# EAGLE board circuit (EAGLE 9.7.0)

Size 262.35 x 241.12 mm. Coordinates in mm from the lower left corner, seen from the top.
Outline: 0,0 262.35,0 262.35,241.12 0,241.12 0,0
Copper layers (1*16): Top 0.035mm / dielectric 1.5mm / Bottom 0.035mm
Design rules "default": minimum track width 6mil, minimum drill 0.35mm, track to track 6mil, track to pad 6mil, pad to pad 6mil, via to via 6mil, smd to smd 6mil, copper to edge 40mil, drill to drill 6mil, minimum pad ring 10mil, minimum via ring 8mil, stop-mask expansion 4mil, vias tented up to drill 0mil, thermal gap 10mil

## Footprints (pad centres in the part's own frame; a part is rotated, then mirrored left to right if it is on the bottom)
LED-RGB-5MM = drill 0.9: B 0.635,0.635; C -0.635,-0.635; G 1.905,-0.635; R -1.905,0.635
DIODE-AXIAL = drill 1: 1 -5.08,0; 2 5.08,0
HC-SR04 = drill 1.016 long: 1 -3.81,0; 2 -1.27,0; 3 1.27,0; 4 3.81,0
MQ-XX-SOCKET = drill 1.27: 1 -6.223,6.223; 2 -8.788,0; 3 -6.223,-6.223; 4 6.223,-6.223; 5 8.788,0; 6 6.223,6.223
MOTOR = drill 1.118 pad 3.15 octagon: + 2.54,0; - -2.54,0
PIEZO = drill 1 pad 1.6: 1 -3.5,0; 2 3.5,0
RESAD1016W63L850D250B = drill 0.83 pad 1.43: 1 -5.08,0; 2 5.08,0
SWITCH-SPDT-PTH-8.5X3.7MM = drill 1.016 pad 1.88: 1 -2.54,0; 2 0,0; 3 2.54,0
TO92 = drill 0.813 octagon: 1 -1.27,0; 2 0,1.905; 3 1.27,0
ARDUINO-UNO-R3-SHIELD = drill 1.016 pad 1.88: 3.3V 24.13,-2.54; 5V 24.13,0; A0 24.13,12.7; A1 24.13,15.24; A2 24.13,17.78; A3 24.13,20.32; A4 24.13,22.86; A5 24.13,25.4; AREF -24.13,-13.97; D2 -24.13,20.32; D3 -24.13,17.78; D4 -24.13,15.24; D5 -24.13,12.7; D6 -24.13,10.16; D7 -24.13,7.62; D8 -24.13,3.81; D9 -24.13,1.27; D10 -24.13,-1.27; D11 -24.13,-3.81; D12 -24.13,-6.35; D13 -24.13,-8.89; GND@0 24.13,2.54; GND@1 24.13,5.08; GND@2 -24.13,-11.43; IOREF 24.13,-7.62; NC 24.13,-10.16; RES 24.13,-5.08; RX -24.13,25.4; SCL -24.13,-19.05; SDA -24.13,-16.51; TX -24.13,22.86; VIN 24.13,7.62
JHD-162A = drill 1.016 long: 1 -19.05,0; 2 -16.51,0; 3 -13.97,0; 4 -11.43,0; 5 -8.89,0; 6 -6.35,0; 7 -3.81,0; 8 -1.27,0; 9 1.27,0; 10 3.81,0; 11 6.35,0; 12 8.89,0; 13 11.43,0; 14 13.97,0; 15 16.51,0; 16 19.05,0

## Placement (x,y rotation side)
D1  LED-RGBRCBG-PTH  [LED-RGB-5MM]  143.34,233.63 0 top
D2  DIODEDIODE-AXIAL  [DIODE-AXIAL]  198.21,187.91 180 top
DIST1  DISTANCE-SENSOR-4PINHC-SR04  [HC-SR04]  26.04,169.49 0 top
GAS1  GAS-SENSORMQ-XX-SOCKET  [MQ-XX-SOCKET]  248.13,174.81 270 top
M1  MOTOR_HDR  [MOTOR]  170.36,223.71 0 top
M2  MOTOR_HDR  [MOTOR]  205.75,218.21 0 top
PIEZO1  PIEZO  [PIEZO]  110.19,227.36 0 top
R1  1k  [RESAD1016W63L850D250B]  185.51,185.37 180 top
R2  1k  [RESAD1016W63L850D250B]  193.13,167.59 90 top
R3  1k  [RESAD1016W63L850D250B]  243.05,191.32 90 top
R4  1k  [RESAD1016W63L850D250B]  182.97,149.81 90 top
S1  TOGGLE  [SWITCH-SPDT-PTH-8.5X3.7MM]  60.22,32.72 180 top
T1  NPN  [TO92]  190.59,190.45 0 top
T2  NPN  [TO92]  213.45,165.05 180 top
U1  ARDUINO-UNO-R3-SHIELD  [ARDUINO-UNO-R3-SHIELD]  57.43,77.42 270 top
U2  LCD-16X2JHD-162A  [JHD-162A]  166.51,98.98 0 top
U3  TMP36GT9Z_TO92  [TO92]  97.62,4.83 0 top

## Library data of the parts
D1 D2 DIST1 GAS1 M1 M2 PIEZO1 R1-R4 S1 U1-U3 = Tinkercad
T1 T2 = Tinkercad; CATEGORY: Transistor; SUB-CATEGORY: BJT; TYPE: NPN

## Nets
D1_C: D1.C R2.2
M1_+: M1.+ T2.3
M2_+: D2.2 M2.+ T1.3
T1_B: R1.1 T1.2
U1_5V: D2.1 DIST1.1 GAS1.4 GAS1.5 GAS1.6 M2.- R4.2 S1.3 T2.1 U1.5V U2.2
U1_A0: S1.2 U1.A0
U1_A4: T2.2 U1.A4
U1_A5: GAS1.1 GAS1.3 R3.1 U1.A5
U1_D2: DIST1.2 U1.D2
U1_D3: D1.G U1.D3
U1_D4: D1.R U1.D4
U1_D5: DIST1.3 U1.D5
U1_D6: U1.D6 U2.14
U1_D7: U1.D7 U2.13
U1_D8: U1.D8 U2.12
U1_D9: U1.D9 U2.11
U1_D10: U1.D10 U2.6
U1_D11: U1.D11 U2.4
U1_D12: PIEZO1.1 U1.D12
U1_D13: R1.2 U1.D13
U1_GND: DIST1.4 GAS1.2 M1.- PIEZO1.2 R2.1 R3.2 S1.1 T1.1 U1.GND@0 U1.GND@1 U1.GND@2 U2.1 U2.3 U2.5 U2.16
U2_LED+: R4.1 U2.15

## Tracks (layer width: path | path; a pad name or v marks a point on that pad's centre or on a via)
D1_C  (1 unrouted)
M1_+  (1 unrouted)
M2_+  (2 unrouted)
T1_B  (1 unrouted)
U1_5V  (10 unrouted)
U1_A0  (1 unrouted)
U1_A4  (1 unrouted)
U1_A5  (3 unrouted)
U1_D2  (1 unrouted)
U1_D3  (1 unrouted)
U1_D4  (1 unrouted)
U1_D5  (1 unrouted)
U1_D6  (1 unrouted)
U1_D7  (1 unrouted)
U1_D8  (1 unrouted)
U1_D9  (1 unrouted)
U1_D10  (1 unrouted)
U1_D11  (1 unrouted)
U1_D12  (1 unrouted)
U1_D13  (1 unrouted)
U1_GND  (14 unrouted)
U2_LED+  (1 unrouted)